# Altium PCB 0.PCB1.PcbDoc (part 2 of 8)
Units mil, origin at the board's own origin, x right, y up, seen from the top; angles counter-clockwise.
Board outline 3897.64 x 3897.64 mil, 6 copper layers (Top Layer, Layer 1, Layer 3, Layer 4, Layer 2, Bottom Layer), stack 60.567 mil thick; 715 components, 563 nets, 2530 pads, 1442 vias.
Unrouted connection lines stored in the file: 6.
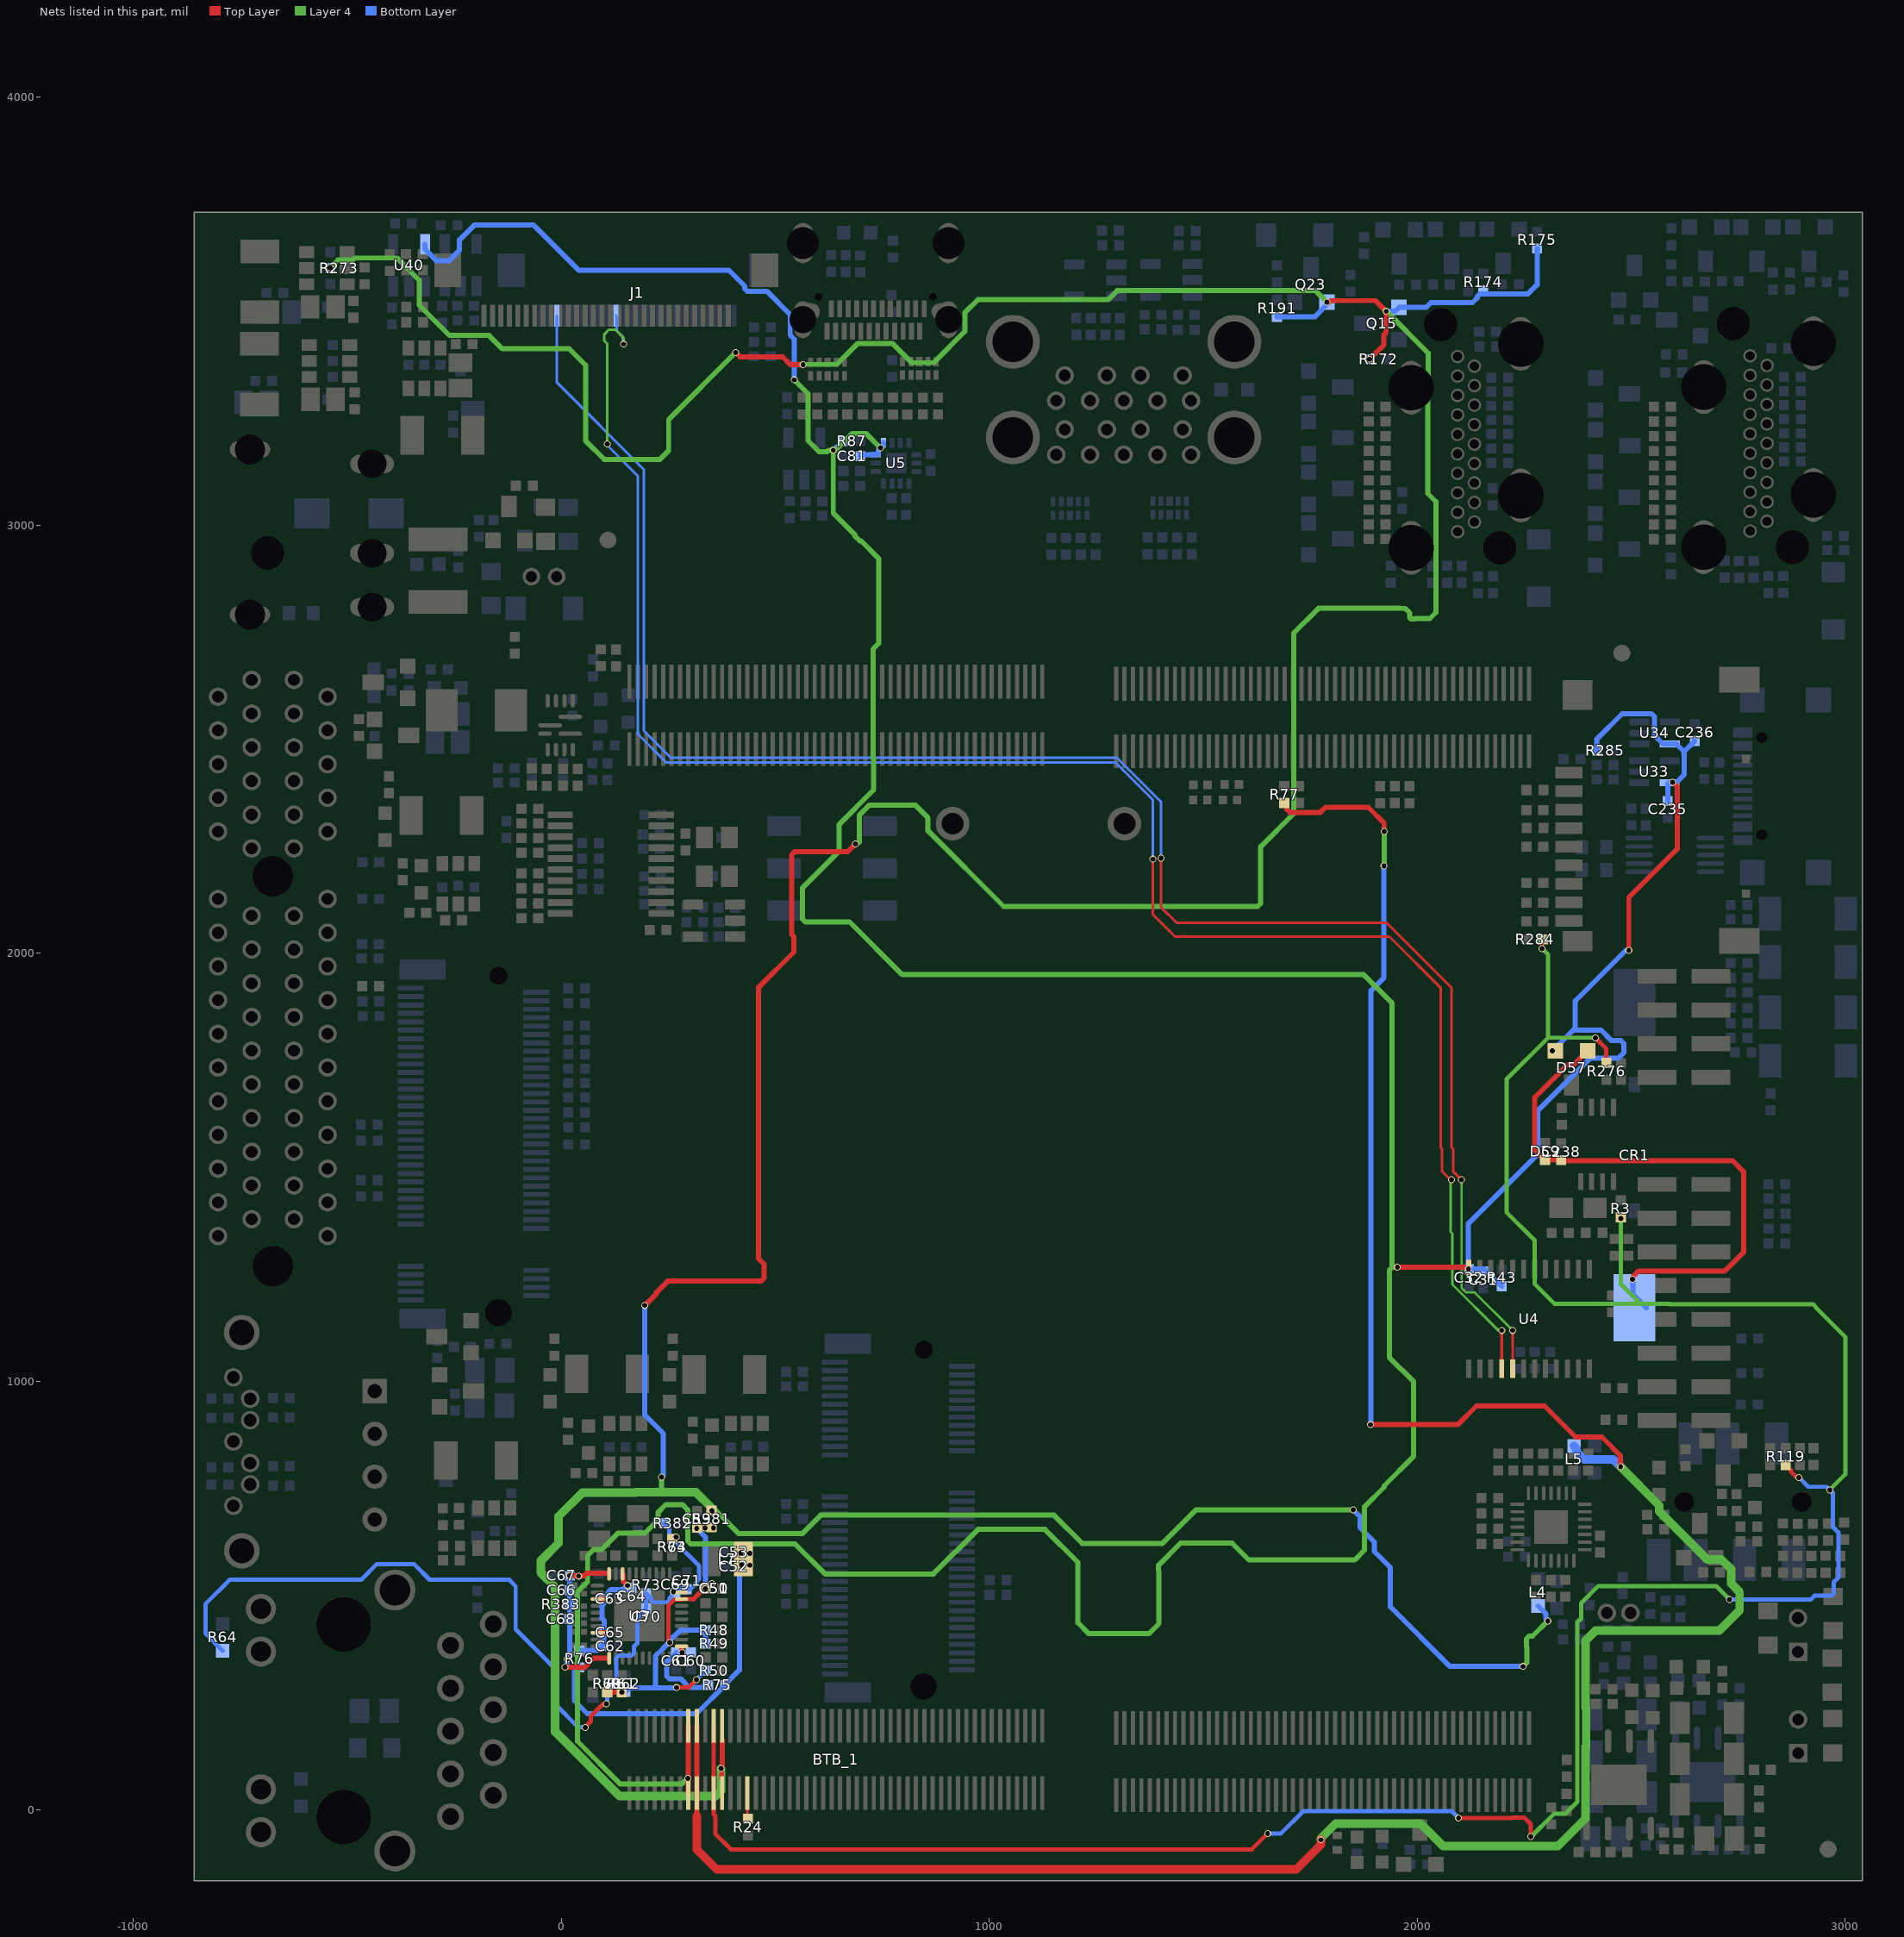
[diagram p6: the nets of this part, all layers, seen from the top]

## Components (designator, comment, footprint, x,y, rotation, side; value= is the part's Value field where it differs from the comment) (continued)
R137 "0R" R0402 -445.1,1923.3 r180 bottom
R138 "100K" R0402 337.09,790.05 r180 top
R139 "10K" R0402 415.06,768.85 r180 top
R140 "1K" R0402 433.9,830.72 r90 bottom
R141 "30K" R0402 337.09,790.05 r180 bottom
R142 "2.2R" R0402 545.29,1021.95 r0 bottom
R143 "2.2R" R0402 545.29,988.15 r0 bottom
R144 "1K" R0402 1020.69,535.95 r0 bottom
R145 "22R" R0402 545.29,549.65 r0 bottom
R146 "1K" R0402 1020.59,501.55 r0 bottom
R147 "4.7K" R0402 545.29,480.75 r0 bottom
R148 "22R" R0402 545.29,515.35 r0 bottom
R149 "20K" R0402 1947.7,2370.7 r270 top
R150 "10K" R0402 1981.9,2370.62 r90 top
R151 "4.7K" R0402 2600.5,3399.21 r0 bottom
R152 "4.7K" R0402 2593.4,3589.79 r270 bottom
R153 "1K" R0402 2830.6,3570.21 r90 bottom
R154 "4.7K" R0402 2995.7,3564.31 r90 bottom
R155 "4.7K" R0402 2936.9,3568.21 r180 bottom
R156 "0R" R0402 2599.02,3357.11 r180 bottom
R157 "47K" R0402 2731.4,3570.01 r0 bottom
R158 "47K" R0402 2652.3,3569.11 r180 bottom
R159 "1.2K" R0402 2592.6,2904.8 r90 bottom
R160 "47K" R0402 2594,3673.91 r270 bottom
R161 "499R" R0402 2572.7,3035.99 r180 bottom
R162 "499R" R0402 2572.7,3070.39 r180 bottom
R163 "499R" R0402 2572.7,3242.39 r180 bottom
R164 "499R" R0402 2572.7,3276.79 r180 bottom
R165 "499R" R0402 2572.7,3173.59 r180 bottom
R166 "499R" R0402 2572.7,3207.99 r180 bottom
R167 "499R" R0402 2572.7,3104.79 r180 bottom
R168 "499R" R0402 2572.7,3139.19 r180 bottom
R169 "1K" R0402 2572.6,2967.51 r180 bottom
R170 "27K" R0402 2490.3,3480.31 r180 bottom
R171 "10K" R0402 2573.1,3002.21 r0 bottom
R172 "4.7K" R0402 1909.1,3387.74 r0 bottom
R173 "10K" R0402 1843.7,3565.46 r270 bottom
R174 "1K" R0402 2154.3,3567.94 r90 bottom
R175 "4.7K" R0402 2280,3666.34 r90 bottom
R176 "10K" R0402 2218.22,3562.74 r180 bottom
R177 "0R" R0402 1938.21,2885.54 r270 bottom
R178 "47K" R0402 2056.3,3562.44 r180 bottom
R179 "47K" R0402 1977.62,3561.94 r180 bottom
R180 "1.2K" R0402 1965,3057.8 r270 bottom
R181 "47K" R0402 1875.6,3653.64 r270 bottom
R182 "499R" R0402 1906.5,3035.94 r180 bottom
R183 "499R" R0402 1906.5,3070.42 r180 bottom
R184 "499R" R0402 1906.5,3242.77 r180 bottom
R185 "499R" R0402 1906.5,3277.24 r180 bottom
R186 "499R" R0402 1906.5,3173.83 r180 bottom
R187 "499R" R0402 1906.5,3208.3 r180 bottom
R188 "499R" R0402 1906.5,3104.89 r180 bottom
R189 "499R" R0402 1906.5,3139.36 r180 bottom
R190 "1K" R0402 1905.81,3002.04 r180 bottom
R191 "27K" R0402 1672.5,3506.34 r90 bottom
R192 "10K" R0402 1906.01,2967.84 r0 bottom
R193 "100R" R0402 2840.2,1460.8 r180 bottom
R194 "100R" R0402 2493.4,1313 r270 top
R195 "100R" R0402 2776.1,946.2 r180 bottom
R196 "100R" R0402 2459.9,910.3 r180 top
R197 "100R" R0402 2777,1019.8 r180 bottom
R198 "100R" R0402 2460.2,984.4 r180 top
R199 "100R" R0402 2776.9,1100.2 r180 bottom
R210 "0R" R0805 2970.7,172.3 r270 top
R211 "0R" R0805 2969.9,313.7 r270 top
R212 "0R" R0805 2971.6,457.73 r270 top
R213 "0R" R0805 2819.5,423.8 r270 top
R216 "33R" R0402 -73.2,2081.63 r180 top
R217 "33R" R0402 -73.2,2116.63 r180 top
R218 "100K" R0402 112.8,826.84 r90 bottom
R219 "49.9R" R0402 -73.2,2116.63 r0 bottom
R220 "49.9R" R0402 -73.2,2081.63 r0 bottom
R221 "1K" R0402 150.2,826.84 r90 bottom
R222 "10K" R0402 130.12,767.4 r180 top
R223 "10K" R0402 210.1,2277.53 r0 bottom
R224 "4.7K" R0402 210.58,2243.73 r0 bottom
R225 "10K" R0402 213.5,2146.33 r0 bottom
R226 "10K" R0402 213.98,2114.43 r0 bottom
R227 "30K" R0402 53.42,785.8 r180 bottom
R228 "33R" R0402 -73.2,2151.63 r180 top
R229 "33R" R0402 -73.2,2186.63 r180 top
R230 "22R" R0402 290.18,2260.25 r270 top
R231 "49.9R" R0402 -73.2,2186.63 r0 bottom
R232 "49.9R" R0402 -73.2,2151.63 r0 bottom
R233 "10K" R0402 213.18,2179.63 r180 bottom
R234 "470R" R0402 214.35,2323.56 r180 bottom
R235 "2.2R" R0402 68.38,2221.5 r180 bottom
R236 "10K" R0402 36.1,1831.2 r0 bottom
R237 "10K" R0402 36.22,1553.1 r0 bottom
R238 "33R" R0402 -73,2234.63 r180 top
R239 "33R" R0402 -73,2268.97 r180 top
R240 "49.9R" R0402 -73,2268.97 r0 bottom
R241 "49.9R" R0402 -73,2234.63 r0 bottom
R242 "33R" R0402 -73,2303.3 r180 top
R243 "33R" R0402 -73,2337.63 r180 top
R244 "49.9R" R0402 -127.7,2289.3 r270 bottom
R245 "49.9R" R0402 -73,2303.3 r0 bottom
R246 "1K" R0402 386.98,2106.43 r180 bottom
R247 "0R" R0402 -444.6,2212.5 r180 bottom
R248 "0R" R0402 -445.3,2127.1 r180 bottom
R249 "100K" R0402 -334.88,2094.8 r180 top
R250 "30K" R0402 -277.78,2134.54 r90 bottom
R251 "1K" R0402 -251.26,2077.4 r180 top
R252 "10K" R0402 -240.38,2138.48 r90 bottom
R255 "10K" R0402 -356.05,2633.67 r270 bottom
R256 "1K" R0402 -472.35,2527.57 r90 top
R257 "10K" R0402 -436.15,2527.17 r270 bottom
R271 "20K" R0402 -513.93,3346.4 r180 bottom
R272 "100K" R0402 -485.21,3504.71 r270 top
R273 "1K" R0402 -519.55,3600.68 r180 bottom
R274 "30K" R0402 -519.55,3563.27 r180 bottom
R275 "22R" R0402 2361.7,2453.8 r180 bottom
R276 "10K" R0402 2442,1724.58 r270 top
R277 "22R" R0402 2476.5,1724.08 r90 top
R278 "22R" R0402 2275.16,2381.32 r0 top
R279 "22R" R0402 2275.08,2334.42 r0 top
R280 "0R" R0402 2275.08,2248.92 r0 top
R281 "22R" R0402 2275.08,2164.32 r0 top
R282 "22R" R0402 2275.08,2118.32 r0 top
R283 "100R" R0402 2275.08,2075.02 r0 top
R284 "NC" R0402 2274.58,2032.7 r180 top
R285 "0R" R0402 2439.31,2473.22 r0 bottom
R290 "100R" R0402 2534.26,2318.6 r90 bottom
R291 "100R" R0402 2500.66,2319.2 r90 bottom
R301 "NC" R0402 -342.9,3633.2 r0 top
R303 "NC" R0402 -342.4,3595.6 r0 top
R306 "1K" R0402 -400.5,3613.9 r90 top
R308 "3.4K" R0402 -278.1,3492.62 r270 bottom
R309 "3.4K" R0402 -395.5,3489.12 r270 bottom
R316 "115K" R0402 -255.82,615.47 r180 bottom
R317 "10K" R0402 -117.92,631.09 r90 bottom
R318 "1K" R0402 -154.92,630.97 r90 bottom
R319 "10K" R0402 -289.62,1074.5 r90 bottom
R320 "1K" R0402 -147.8,1088.1 r180 bottom
R321 "10K" R0402 -231.1,1080.6 r180 bottom
R322 "20K" R0402 -256.4,582.07 r180 top
R323 "3.4K" R0402 1460.2,3491.23 r180 bottom
R324 "NC" R0402 1383,3457.96 r180 bottom
R325 "470R" R0402 2557.41,654.82 r180 top
R326 "300K" R0402 2774.71,626.52 r180 top
R327 "0R" R0402 2796.11,554.82 r0 top
R328 "10K" R0402 -445.1,1923.3 r180 top
R334 "1K" R0402 2002.22,-93.8 r180 bottom
R335 "10K" R0402 2003.42,-128.2 r0 bottom
R341 "0R" R0603 2637.01,333.55 r180 top
R342 "NC" R0603 2637.41,283.95 r180 top
R343 "20K" R0402 2576.71,-73.45 r90 top
R344 "20K" R0402 2471.41,-99.65 r0 top
R345 "1K" R0402 2348.81,16.83 r270 top
R346 "10K" R0402 2313.4,-14.7 r90 top
R347 "0R" R0603 2513.21,294.45 r0 bottom
R348 "NC" R0603 2513.51,343.65 r0 bottom
R349 "20K" R0402 2569.01,-64.33 r90 bottom
R350 "20K" R0402 2672.59,-94.65 r180 bottom
R351 "1K" R0402 2799.9,-72 r270 top
R352 "10K" R0402 2798.6,24.7 r90 top
R354 "27K" R0402 1672.1,3587.64 r90 bottom
R373 "0R" R0201 42.53,523.9 r180 top
R374 "0R" R0201 42.53,504.2 r180 top
R375 "0R" R0201 42.53,474.9 r180 top
R376 "0R" R0201 42.53,455.1 r180 top
R377 "0R" R0201 42.53,434.9 r180 top
R378 "0R" R0201 42.53,415 r180 top
R379 "0R" R0201 42.53,383.1 r180 top
R380 "0R" R0201 42.53,363.1 r180 top
R381 "0R" R0402 351.2,678.7 r90 top
R382 "0R" R0402 260.32,668.7 r0 bottom
R383 "0R" R0402 -0.1,478.6 r180 bottom
R386 "1M" R0402 146.36,593.08 r0 top
R387 "22R" R0402 74.9,592.71 r0 top
SPK1 "FS1508MB0810-H8.0" BEEP-TH_BD15.0-P10.20-D1.2 1115.31,2302.9 r180 bottom
SW1 "GT-TC029B-H020-L1N" SW-SMD_L3.9-W2.9-P4.15-LS5.0 2912.81,1748.9 r180 bottom
SW2 "GT-TC029B-H020-L1N" SW-SMD_L3.9-W2.9-P4.15-LS5.0 2912.81,1862.3 r180 bottom
SW3 "GT-TC029B-H020-L1N" SW-SMD_L3.9-W2.9-P4.15-LS5.0 2912.81,1979.5 r180 bottom
SW4 "GT-TC029B-H020-L1N" SW-SMD_L3.9-W2.9-P4.15-LS5.0 2912.81,2092.1 r180 bottom
SW5 "MST22D18G2" SW-SMD_MST22D18G2 632.3,2198.6 r270 bottom
U1 "ASP9135ZC-R" SOT23_6 -319.6,3367.02 r0 top
U2 "MP8759GD-Z" QFN12-2R00X3R00 -2.12,2532.79 r180 top
U3 "RTL8211F" qfp_40p_r 182.89,452.11 r0 top
U4 "XL9535" TSSOP24-0R65-7R80X4R40 2261.4,1145.8 r90 top
U5 "FUSB302BMPX" WQFN14-0R50-2R5X2R5EP1R45X1R45 782.66,3145 r0 bottom
U6 "LPW5209AB5F" SOT23-5 568,3155.6 r180 bottom
U7 "LPW5209AB5F" SOT23-5 1248,3572.03 r270 bottom
U8 "RCLAMP0524P" USON_10 836.87,3366.65 r0 top
U9 "RCLAMP0524P" USON_10 622.53,3364.75 r0 top
U10 "RCLAMP0524P" USON_10 1188.59,3039.08 r0 bottom
U11 "RCLAMP0524P" USON_10 1421.51,3040.38 r0 bottom
U16 "ES8388" qfn28_0r45-4x4EP2R6X2R6 2312.97,659.92 r90 top
U17 "ASP9135ZC-R" SOT23_6 433.9,854.34 r180 top
U18 "CH340E" MSOP-10_L3.0-W3.0-P0.50-LS5.0-BL -10891.9,20223.34 r270 bottom
U23 "D2315-3R3" DFN1006-2L-BI 1813.4,-77.5 r90 top
U25 "ASP9135ZC-R" SOT23_6 150.2,854.4 r180 top
U26 "RS2CG5705BLE" TSSOP20 115.92,2208.41 r90 top
U27 "TP5108E23E-33" SOT23-5 357.28,2076.43 r90 top
U28 "ASP9135ZC-R" SOT23_6 -240.38,2162.1 r180 top
U31 "ASP9135ZC-R" SOT23_6 -541.49,3383.8 r270 top
U32 "ASP9135ZC-R" SOT23_6 -547.11,3600.68 r270 top
U33 "74LVC1G125GW" SOT-353 2554.03,2424.54 r90 bottom
U34 "74LVC1G125GW" SOT-353 2554.53,2515.04 r90 bottom
U35 "BM8563EMA" msop-8 2420.3,1553.7 r0 top
U39 "LPW5209AB5F" SOT23-5 -234.73,3607.89 r180 bottom
U40 "LPW5209AB5F" SOT23-5 -355.4,3607.2 r180 bottom
U42 "NS4110B" SOP-8-EP-2R5X3R4 2470.91,57.45 r0 top
U43 "ASP9135ZC-R" SOT23_6 -156.42,657.57 r180 top
U46 "NS4110B" SOP-8-EP-2R5X3R4 2678.41,64.15 r180 bottom
U48 "LPW5209AB5F" SOT23-5 1425.8,3572.93 r270 bottom
USBC1 "ZX-TYPEC-WTM1628" USB-C-SMD_ZX-TYPEC-WTM1628 2893.76,2390.32 r270 bottom
Y2 "25MHz" 3225 133.98,661.71 r0 top
Y4 "25MHz" 3225 363.98,2225.33 r90 top
Y5 "32.768KHz" 3215 2375.9,1405.1 r0 top

## Footprints (in the part's own frame and the unit in brackets; to place one, negate y for a bottom-side part, rotate by r counter-clockwise, add the part's x,y. Pads: shape width x height; smd on the part's side, far side on the other; paste and mask are expansions set on the pad)
3215 [mil]
  rect 55.12x47.24 smd: 1(-39.4,0) 2(39.4,0)
  silkscreen extent -75,-35 75,35, body extent -67,-24 67,24, height 150
3225 [mm]
  rect 1.3x1 smd: 1(-1.15,-0.75) 2(1.15,-0.75) 3(1.15,0.75) 4(-1.15,0.75)
  silkscreen extent -2.41,-1.52 0.3,1.2, body extent -1.9,-1.4 1.9,1.4, height 3.81
audio_smd_7p_6r0x8r8 [mm]
  rect 2.5x1.4 smd: 1(3.45,-3.125) 2(3.45,-0.225) 3(3.45,2.675) 4(-3.45,2.975) 6(-3.45,-2.125) 7(-3.45,0.775) 8(3.45,4.875)
  round 1.2 hole 1.2 unplated: ""(0,-3.625) ""(0,3.375)
  silkscreen extent -3,-7.13 4.25,7.38, body extent -5,-7.63 5,7.63, height 3.81
BEEP-TH_BD15.0-P10.20-D1.2 [mm]
  round 2 hole 1.3 paste+0 mask+0.051: 1(-5.1,0) 2(5.1,0)
  silkscreen extent -7.5,-7.5 7.5,7.5
C0402 [mil]
  rect 23.6x23.6 smd: 1(-19.68,0) 2(19.68,0)
  silkscreen extent -37,-17 37,17, body extent -37,-17 37,17, height 150
C0603 [mil]
  rect 31.5x31.5 smd: 1(-31.5,0) 2(31.5,0)
  silkscreen extent -55,-25 55,25, body extent -48,-16 48,16, height 150
C0603_L [mm]
  rect 0.75x0.85 smd: 1(-0.725,0) 2(0.725,0)
  silkscreen extent -1.35,-0.69 1.35,0.69, body extent -0.8,-0.4 0.8,0.4, height 0.8
C0805#1 [mm]
  rect 1.1x1.4 smd: 1(-0.75,0) 2(0.75,0)
  body extent -1.1,-0.72 1.1,0.72, height 1.4
C0805#2 [mm]
  rect 1.16x1.47 smd: 1(-0.89,0) 2(0.89,0)
  silkscreen extent -1.77,-1.04 1.77,1.04, body extent -1.47,-0.74 1.47,0.74, height 3.81
C1206 [mil]
  rect 47.24x74.8 smd: 1(-62.99,0) 2(62.99,0)
  silkscreen extent -94,-47 94,47
CR1220_A [mm]
  rect 0.9x0.7 smd: 0(-3.6,0) 0(3.9,0)
  rect 4x2.5 smd: 1(9.652,0) 2(-8.458,0)
  silkscreen extent -7.5,-7.5 10.16,7.5, body extent -9.42,-7.45 10.34,7.45, height 4.05
dc_in_th_3p_10r1x11r6 [mil]
  oval 94.5x39.4 / inner round 60 / far side oval 94.5x39.4 hole 70.9 slot 15.7 at 90 deg: 1(-111.25,-194.9) 5(-111.25,190.9)
  oval 102.4x43.3 hole 66.9 slot 19.7 at 90 deg: 2(174.25,-51.2) 3(174.25,157.4)
  oval 102.4x43.3 / inner round 60 / far side oval 102.4x43.3 hole 66.9 slot 19.7 at 90 deg: 4(174.25,-177.2)
  round 78.7 hole 78.7 unplated: ""(-69.85,-51.2)
  silkscreen extent -232,-201 226,197, body extent -237,-228 237,228, height 150
DFN1006-2L-BI [mm]
  rect 0.45x0.55 smd paste+0 mask+0.051: 1(-0.425,0) 2(0.425,0)
  silkscreen extent -0.8,-0.4 0.8,0.4
esd0402 [mil]
  rect 23.6x23.6 smd: 1(-19.68,0) 2(19.68,0)
  silkscreen extent -37,-17 37,17, body extent -37,-17 37,17, height 150
F1812 [mil]
  rect 55.38x137.76 smd: 1(-72.97,0) 2(72.97,0)
  silkscreen extent -110,-79 110,79, body extent -89,-63 89,63, height 41
F_100PIN [mm]
  rect 2x0.25 smd: 1(-2,-12.25) 2(-2,-11.75) 3(-2,-11.25) 4(-2,-10.75) 5(-2,-10.25) 6(-2,-9.75) 7(-2,-9.25) 8(-2,-8.75) 9(-2,-8.25) 10(-2,-7.75) 11(-2,-7.25) 12(-2,-6.75) 13(-2,-6.25) 14(-2,-5.75) 15(-2,-5.25) 16(-2,-4.75) 17(-2,-4.25) 18(-2,-3.75) 19(-2,-3.25) 20(-2,-2.75) 21(-2,-2.25) 22(-2,-1.75) 23(-2,-1.25) 24(-2,-0.75) 25(-2,-0.25) 26(-2,0.25) 27(-2,0.75) 28(-2,1.25) 29(-2,1.75) 30(-2,2.25) 31(-2,2.75) 32(-2,3.25) 33(-2,3.75) 34(-2,4.25) 35(-2,4.75) 36(-2,5.25) 37(-2,5.75) 38(-2,6.25) 39(-2,6.75) 40(-2,7.25) 41(-2,7.75) 42(-2,8.25) 43(-2,8.75) 44(-2,9.25) 45(-2,9.75) 46(-2,10.25) 47(-2,10.75) 48(-2,11.25) 49(-2,11.75) 50(-2,12.25) 51(2,12.25) 52(2,11.75) 53(2,11.25) 54(2,10.75) 55(2,10.25) 56(2,9.75) 57(2,9.25) 58(2,8.75) 59(2,8.25) 60(2,7.75) 61(2,7.25) 62(2,6.75) 63(2,6.25) 64(2,5.75) 65(2,5.25) 66(2,4.75) 67(2,4.25) 68(2,3.75) 69(2,3.25) 70(2,2.75) 71(2,2.25) 72(2,1.75) 73(2,1.25) 74(2,0.75) 75(2,0.25) 76(2,-0.25) 77(2,-0.75) 78(2,-1.25) 79(2,-1.75) 80(2,-2.25) 81(2,-2.75) 82(2,-3.25) 83(2,-3.75) 84(2,-4.25) 85(2,-4.75) 86(2,-5.25) 87(2,-5.75) 88(2,-6.25) 89(2,-6.75) 90(2,-7.25) 91(2,-7.75) 92(2,-8.25) 93(2,-8.75) 94(2,-9.25) 95(2,-9.75) 96(2,-10.25) 97(2,-10.75) 98(2,-11.25) 99(2,-11.75) 100(2,-12.25)
  silkscreen extent -2.54,-14.48 2,13.85
FPC-30P-0P5 [mm]
  rect 0.3x1.3 smd: 1(-7.25,2.733) 2(-6.75,2.733) 3(-6.25,2.733) 4(-5.75,2.733) 5(-5.25,2.733) 6(-4.75,2.733) 7(-4.25,2.733) 8(-3.75,2.733) 9(-3.25,2.733) 10(-2.75,2.733) 11(-2.25,2.733) 12(-1.75,2.733) 13(-1.25,2.733) 14(-0.75,2.733) 15(-0.25,2.733) 16(0.25,2.733) 17(0.75,2.733) 18(1.25,2.733) 19(1.75,2.733) 20(2.25,2.733) 21(2.75,2.733) 22(3.25,2.733) 23(3.75,2.733) 24(4.25,2.733) 25(4.75,2.733) 26(5.25,2.733) 27(5.75,2.733) 28(6.25,2.733) 29(6.75,2.733) 30(7.25,2.733)
  rect 1.6x2 smd: 31(9.4,0.032) 32(-9.4,0.032)
  silkscreen extent -10.05,-3.27 10.05,4.14, body extent -10.05,-3.35 10.05,3.35, height 3.81
fpc_24p_0p5 [mm]
  rect 0.3x1.3 smd: 1(-5.75,-2.701) 2(-5.25,-2.701) 3(-4.75,-2.701) 4(-4.25,-2.701) 5(-3.75,-2.701) 6(-3.25,-2.701) 7(-2.75,-2.701) 8(-2.25,-2.701) 9(-1.75,-2.701) 10(-1.25,-2.701) 11(-0.75,-2.701) 12(-0.25,-2.701) 13(0.25,-2.701) 14(0.75,-2.701) 15(1.25,-2.701) 16(1.75,-2.701) 17(2.25,-2.701) 18(2.75,-2.701) 19(3.25,-2.701) 20(3.75,-2.701) 21(4.25,-2.701) 22(4.75,-2.701) 23(5.25,-2.701) 24(5.75,-2.701)
  rect 1.6x2 smd: 25(7.45,0.001) 26(-7.45,0.001)
  silkscreen extent -8.1,-3.95 8.1,3.35, body extent -8.1,-3.35 8.1,3.35, height 3.81
HDMI-SMD [mm]
  round 0.8 hole 0.55: 1(1.276,0.5) 2(0.707,-0.5) 3(0.121,0.5) 4(-0.449,-0.5) 5(-1.034,0.5) 6(-1.605,-0.5) 7(-2.189,0.5) 8(-2.761,-0.5) 9(-3.344,0.5) 10(-3.917,-0.5) 11(-4.499,0.5) 12(-5.073,-0.5) 13(-5.654,0.5) 14(-6.229,-0.5) 15(-6.809,0.5) 16(-7.385,-0.5) 17(-7.964,0.5) 18(-8.541,-0.5) 19(-9.119,0.5)
  oval 3.2x1.4 / inner round 1.524 / far side oval 3.2x1.4 hole 2.7 slot 0.9 at 90 deg: G1(-10.074,3.25) G2(-0.574,3.25) G3(-6.974,-3.25) G4(2.026,-3.25)
  round 1.999 hole 1.999 unplated: ""(-10.074,-2) ""(3.176,1.5)
  silkscreen extent -11.43,-5.02 19.77,5, body extent -11.78,-4.05 11.78,4.05, height 3.81
HDR-SMD_HX-PZ2.0-2X4P-WT [mm]
  rect 0.89x2.3 smd paste+0 mask+0.05: 1(-3,-1.6) 2(-3,1.6) 3(-1,-1.6) 4(-1,1.6) 5(1,-1.6) 6(1,1.6) 7(3,-1.6) 8(3,1.6)
  silkscreen extent -4.16,-10.15 4,-1.81
HY911130A [mm]
  round 1.6 / inner round 1.524 / far side round 1.6 hole 1: 1(5.629,-8.79) 2(4.359,-6.25) 3(3.089,-8.79) 4(1.819,-6.25) 5(0.549,-8.79) 6(-0.721,-6.25) 7(-1.991,-8.79) 8(-3.261,-6.25) 9(-4.531,-8.79)
  round 1.6 hole 1: 10(-5.801,-6.25)
  round 1.8 / inner round 1.524 / far side round 1.8 hole 1.2: 11(6.534,5) 12(3.994,5) 13(-4.177,5) 14(-6.717,5)
  round 2.43 / inner round 1.524 / far side round 2.43 hole 1.83: 15(7.654,-2.95) 16(-7.836,-2.95)
  round 3.25 hole 3.25 unplated: ""(-5.806,0.1) ""(5.624,0.1)
  silkscreen extent -8.11,-10.3 7.93,17.1, body extent -9.11,-11.1 9.11,11.1, height 3.81
L0518 [mm]
  rect 1.9x2.5 smd: 1(-2.05,0) 2(2.05,0)
  silkscreen extent -2.75,-2.65 2.75,2.65, body extent -3.1,-2.8 3.1,2.8, height 3.81
L0603#1 [mm]
  rect 0.75x0.85 smd: 1(-0.725,0) 2(0.725,0)
  silkscreen extent -1.35,-0.69 1.35,0.69, body extent -0.8,-0.4 0.8,0.4, height 0.8
L0603#2 [mm]
  rect 0.8x0.8 smd: 1(-0.8,0) 2(0.8,0)
  silkscreen extent -1.38,-0.61 1.4,0.61, body extent -1.2,-0.4 1.2,0.4, height 3.81
L2520 [mil]
  rect 44x80 smd: 1(-37.75,0) 2(37.75,0)
  silkscreen extent -68,-48 68,48, body extent -65,-45 65,45, height 150
l4520 [mil]
  rect 55.12x90.55 smd: 1(-70.97,-0.1) 2(70.77,-0.1)
  silkscreen extent -91,-87 90,87, body extent -91,-87 91,87, height 150
LED0603_R [mil]
  rect 30x30 smd: 1(-30,0) 2(30,0)
  silkscreen extent -53,-23 61,23, body extent -31,-16 32,16, height 18
M2_NGFF_E_KEY [mm]
  rect 0.3x1.55 smd: 1(9.25,-3.3) 2(9,4.25) 3(8.75,-3.3) 4(8.5,4.25) 5(8.25,-3.3) 6(8,4.25) 7(7.75,-3.3) 8(7.5,4.25) 9(7.25,-3.3) 10(7,4.25) 11(6.75,-3.3) 12(6.5,4.25) 13(6.25,-3.3) 14(6,4.25) 15(5.75,-3.3) 16(5.5,4.25) 17(5.25,-3.3) 18(5,4.25) 19(4.75,-3.3) 20(4.5,4.25) 21(4.25,-3.3) 22(4,4.25) 23(3.75,-3.3) 32(1.5,4.25) 33(1.25,-3.3) 34(1,4.25) 35(0.75,-3.3) 36(0.5,4.25) 37(0.25,-3.3) 38(0,4.25) 39(-0.25,-3.3) 40(-0.5,4.25) 41(-0.75,-3.3) 42(-1,4.25) 43(-1.25,-3.3) 44(-1.5,4.25) 45(-1.75,-3.3) 46(-2,4.25) 47(-2.25,-3.3) 48(-2.5,4.25) 49(-2.75,-3.3) 50(-3,4.25) 51(-3.25,-3.3) 52(-3.5,4.25) 53(-3.75,-3.3) 54(-4,4.25) 55(-4.25,-3.3) 56(-4.5,4.25) 57(-4.75,-3.3) 58(-5,4.25) 59(-5.25,-3.3) 60(-5.5,4.25) 61(-5.75,-3.3) 62(-6,4.25) 63(-6.25,-3.3) 64(-6.5,4.25) 65(-6.75,-3.3) 66(-7,4.25) 67(-7.25,-3.3) 68(-7.5,4.25) 69(-7.75,-3.3) 70(-8,4.25) 71(-8.25,-3.3) 72(-8.5,4.25) 73(-8.75,-3.3) 74(-9,4.25) 75(-9.25,-3.3)
  rect 1.2x2.75 smd: 76(10.35,-2.525) 77(-10.35,-2.525)
  round 1.6 hole 1.6 unplated: ""(-10,1.975)
  round 1.1 hole 1.1 unplated: ""(10,1.975)
  silkscreen extent -11,-1.13 11,4.12, body extent -11,-4.13 11,4.12, height 3.81
M2_NGFF_M_KEY [mm]
  rect 0.3x1.55 smd: 1(-9.25,3.762) 2(-9,-3.687) 3(-8.75,3.762) 4(-8.5,-3.687) 5(-8.25,3.762) 6(-8,-3.687) 7(-7.75,3.762) 8(-7.5,-3.687) 9(-7.25,3.762) 10(-7,-3.687) 11(-6.75,3.762) 12(-6.5,-3.687) 13(-6.25,3.762) 14(-6,-3.687) 15(-5.75,3.762) 16(-5.5,-3.687) 17(-5.25,3.762) 18(-5,-3.687) 19(-4.75,3.762) 20(-4.5,-3.687) 21(-4.25,3.762) 22(-4,-3.687) 23(-3.75,3.762) 24(-3.5,-3.687) 25(-3.25,3.762) 26(-3,-3.687) 27(-2.75,3.762) 28(-2.5,-3.687) 29(-2.25,3.762) 30(-2,-3.687) 31(-1.75,3.762) 32(-1.5,-3.687) 33(-1.25,3.762) 34(-1,-3.687) 35(-0.75,3.762) 36(-0.5,-3.687) 37(-0.25,3.762) 38(0,-3.687) 39(0.25,3.762) 40(0.5,-3.687) 41(0.75,3.762) 42(1,-3.687) 43(1.25,3.762) 44(1.5,-3.687) 45(1.75,3.762) 46(2,-3.687) 47(2.25,3.762) 48(2.5,-3.687) 49(2.75,3.762) 50(3,-3.687) 51(3.25,3.762) 52(3.5,-3.687) 53(3.75,3.762) 54(4,-3.687) 55(4.25,3.762) 56(4.5,-3.687) 57(4.75,3.762) 58(5,-3.687) 67(7.25,3.762) 68(7.5,-3.687) 69(7.75,3.762) 70(8,-3.687) 71(8.25,3.762) 72(8.5,-3.687) 73(8.75,3.762) 74(9,-3.687) 75(9.25,3.762)
  rect 1.2x2.75 smd: 76(10.35,3.062) 77(-10.35,3.062)
  round 1.1 hole 1.1 unplated: ""(-10,-1.438)
  round 1.6 hole 1.6 unplated: ""(10,-1.438)
  silkscreen extent -10.95,-81.8 10.95,1.61, body extent -10.95,-4.56 10.95,4.56, height 3.81
"Mark 1" [mm]
  round 1 smd paste-1 mask+0.7: Mark(0,0)
  Keep-Out Layer circle w0.1: c0,0 r1.5
MIC2-4R00-TM [mm]
  round 1.1 hole 0.7: 1(-0.7,-0.55) 2(0.7,-0.55)
  silkscreen extent -2,-2 2,2, body extent -2.11,-2.11 2.11,2.11, height 3.81
msop-8 [mm]
  rect 0.3x1 smd: 1(-0.975,-2.2) 2(-0.325,-2.2) 3(0.325,-2.2) 4(0.975,-2.2) 5(0.975,2.2) 6(0.325,2.2) 7(-0.325,2.2) 8(-0.975,2.2)
  silkscreen extent -1.5,-3.3 1.5,1.5, body extent -1.5,-2.8 1.5,2.8, height 3.81
MSOP-10_L3.0-W3.0-P0.50-LS5.0-BL [mm]
  oval 0.28x1.62 smd paste+0 mask+0.051: 1(456.035,-344.857) 2(456.535,-344.857) 3(457.035,-344.857) 4(457.535,-344.857) 5(458.035,-344.857) 6(458.035,-340.637) 7(457.535,-340.637) 8(457.035,-340.637) 9(456.535,-340.637) 10(456.035,-340.637)
  silkscreen extent 455.29,-345.01 458.61,-341.68
PCIE_64PIN_1R00 [mm]
  round 1.1 hole 0.7: A1(-16.765,1.25) A2(-15.765,3.25) A3(-14.765,1.25) A4(-13.765,3.25) A5(-12.765,1.25) A6(-11.765,3.25) A7(-10.765,1.25) A8(-9.765,3.25) A9(-8.765,1.25) A10(-7.765,3.25) A11(-6.765,1.25) A12(-3.765,3.25) A13(-2.765,1.25) A14(-1.765,3.25) A15(-0.765,1.25) A16(0.235,3.25) A17(1.235,1.25) A18(2.235,3.25) A19(3.235,1.25) A20(4.235,3.25) A21(5.235,1.25) A22(6.235,3.25) A23(7.235,1.25) A24(8.235,3.25) A25(9.235,1.25) A26(10.235,3.25) A27(11.235,1.25) A28(12.235,3.25) A29(13.235,1.25) A30(14.235,3.25) A31(15.235,1.25) A32(16.235,3.25) B1(-16.765,-1.25) B2(-15.765,-3.25) B3(-14.765,-1.25) B4(-13.765,-3.25) B5(-12.765,-1.25) B6(-11.765,-3.25) B7(-10.765,-1.25) B8(-9.765,-3.25) B9(-8.765,-1.25) B10(-7.765,-3.25) B11(-6.765,-1.25) B12(-3.765,-3.25) B13(-2.765,-1.25) B14(-1.765,-3.25) B15(-0.765,-1.25) B16(0.235,-3.25) B17(1.235,-1.25) B18(2.235,-3.25) B19(3.235,-1.25) B20(4.235,-3.25) B21(5.235,-1.25) B22(6.235,-3.25) B23(7.235,-1.25) B24(8.235,-3.25) B25(9.235,-1.25) B26(10.235,-3.25) B27(11.235,-1.25) B28(12.235,-3.25) B29(13.235,-1.25) B30(14.235,-3.25) B31(15.235,-1.25) B32(16.235,-3.25)
  round 2.4 hole 2.4 unplated: ""(-5.115,0) ""(18.035,0)
  silkscreen extent -19.61,-4.39 19.61,4.39, body extent -19.61,-4.39 19.61,4.39, height 3.81
PH-1x2-2P0_l [mm]
  rect 1.1x1.1 hole 0.7: 1(-1,-0.6)
  round 1.1 hole 0.7: 2(1,-0.6)
  silkscreen extent -3,-2.6 3,2.6, body extent -3.1,-2.7 3.1,2.7, height 3.81
QFN12-2R00X3R00 [mm]
  oval 1.4x0.25 smd: 1(-0.6,0.5) 2(-0.6,-0.5) 7(0.6,0)
  oval 0.25x0.8 smd: 3(-0.75,-1.45) 4(-0.25,-1.45) 5(0.25,-1.45) 6(0.75,-1.45) 9(0.75,1.45) 10(0.25,1.45) 11(-0.25,1.45) 12(-0.75,1.45)
  oval 0.8x0.25 smd: 8(0.9,0.5)
  silkscreen extent -2.25,-2 1.5,2, body extent -1.5,-2 1.5,2, height 3.81
qfn28_0r45-4x4EP2R6X2R6 [mm]
  oval 0.8x0.2 smd: 1(-2,1.35)
  rect 0.8x0.2 smd: 2(-2,0.9) 3(-2,0.45) 4(-2,0) 5(-2,-0.45) 6(-2,-0.9) 7(-2,-1.35) 15(2,-1.35) 16(2,-0.9) 17(2,-0.45) 18(2,0) 19(2,0.45) 20(2,0.9) 21(2,1.35)
  rect 0.2x0.8 smd: 8(-1.35,-2) 9(-0.9,-2) 10(-0.45,-2) 11(0,-2) 12(0.45,-2) 13(0.9,-2) 14(1.35,-2) 22(1.35,2) 23(0.9,2) 24(0.45,2) 25(0,2) 26(-0.45,2) 27(-0.9,2) 28(-1.35,2)
  rect 2x2 smd: 29(0,0)
  silkscreen extent -3.15,-2 2,2.03, body extent -2.5,-2.5 2.5,2.5, height 3.81
qfp_40p_r [mil]
  oval 31.5x8.66 smd: 1(-98.43,70.87) 2(-98.43,55.12) 3(-98.43,39.37) 4(-98.43,23.62) 5(-98.43,7.87) 6(-98.43,-7.87) 7(-98.43,-23.62) 8(-98.43,-39.37) 9(-98.43,-55.12) 10(-98.43,-70.87) 21(98.43,-70.87) 22(98.43,-55.12) 23(98.43,-39.37) 24(98.43,-23.62) 25(98.43,-7.87) 26(98.43,7.87) 27(98.43,23.62) 28(98.43,39.37) 29(98.43,55.12) 30(98.43,70.87)
  oval 8.66x31.5 smd: 11(-70.87,-98.43) 12(-55.12,-98.43) 13(-39.37,-98.43) 14(-23.62,-98.43) 15(-7.87,-98.43) 16(7.87,-98.43) 17(23.62,-98.43) 18(39.37,-98.43) 19(55.12,-98.43) 20(70.87,-98.43) 31(70.87,98.43) 32(55.12,98.43) 33(39.37,98.43) 34(23.62,98.43) 35(7.87,98.43) 36(-7.87,98.43) 37(-23.62,98.43) 38(-39.37,98.43) 39(-55.12,98.43) 40(-70.87,98.43)
  rect 118.11x118.11 smd: 41(0,0)
  silkscreen extent -124,-98 98,124, body extent -116,-116 116,116, height 150
R0201 [mm]
  rect 0.35x0.35 smd: 1(-0.275,0) 2(0.275,0)
  silkscreen extent -0.51,-0.25 0.51,0.25, body extent -0.47,-0.18 0.47,0.18, height 3.81
R0402 [mil]
  rect 23.6x23.6 smd: 1(-19.68,0) 2(19.68,0)
  silkscreen extent -37,-17 37,17, body extent -37,-17 37,17, height 150
R0402_L [mm]
  rect 0.5x0.5 smd: 1(-0.425,0) 2(0.425,0)
  silkscreen extent -0.88,-0.46 0.87,0.46, body extent -0.5,-0.25 0.5,0.25, height 0.3
R0603 [mil]
  rect 31.5x31.5 smd: 1(-31.5,0) 2(31.5,0)
  silkscreen extent -55,-24 55,24, body extent -47,-16 47,16, height 150
R0805 [mil]
  rect 40x45 smd: 1(40,0) 2(-40,0)
  silkscreen extent -70,-35 70,35, body extent -60,-25 60,25, height 150
SMA_CA [mm]
  rect 2.1x1.8 smd: 1(-2.2,0) 2(2.2,0)
  silkscreen extent -2.2,-1.3 2.2,1.3, body extent -3.3,-1.4 3.3,1.4, height 3.81
SOD523 [mm]
  rect 0.6x0.7 smd: 1(-0.71,0) 2(0.71,0)
  silkscreen extent -1.3,-0.5 0.6,0.5, body extent -1.1,-0.4 1.1,0.4, height 3.81
SOD-123 [mm]
  rect 1.2x1.4 smd: 1(1.7,0) 2(-1.7,0)
  silkscreen extent -1.8,-0.9 1.8,0.9, body extent -2.4,-1 2.4,1, height 3.81
SOP-8-EP-2R5X3R4 [mm]
  oval 0.4x1.4 smd: 1(-1.905,-2.6) 2(-0.635,-2.6) 3(0.635,-2.6) 4(1.905,-2.6) 5(1.905,2.6) 6(0.635,2.6) 7(-0.635,2.6) 8(-1.905,2.6)
  rect 3.3x2.4 smd: 9(0,0)
  silkscreen extent -2.79,-3.18 2.5,2, body extent -2.5,-3 2.5,3, height 3.81
SOT23 [mil]
  rect 36x36 smd: 1(-37.5,-43.5) 2(37.5,-43.5)
  rect 36x50 smd: 3(0,36.5)
  silkscreen extent -55,-55 55,36, body extent -56,-62 56,62, height 150
SOT23-5 [mm]
  rect 0.599x1.199 smd: 1(-0.95,-1.25) 2(0,-1.25) 3(0.95,-1.25) 4(0.95,1.25) 5(-0.95,1.25)
  silkscreen extent -1.96,-1.85 1.5,0.9, body extent -1.6,-1.9 1.6,1.9, height 3.81
SOT23_6 [mm]
  rect 0.7x0.9 smd: 1(-0.95,-1.2) 2(0,-1.2) 3(0.95,-1.2) 4(0.95,1.2) 5(0,1.2) 6(-0.95,1.2)
  silkscreen extent -2.19,-1.25 1.4,0.6, body extent -1.4,-1.2 1.4,1.2, height 3.81
SOT-353 [mil]
  rect 16x47 smd: 1(-25.91,-35.43) 2(-0.31,-35.43) 3(25.28,-35.43) 4(25.28,35.43) 5(-25.91,35.43)
  silkscreen extent -55,-80 45,70, body extent -40,-65 40,65, height 150
ssata_v [mm]
  round 1.1 hole 0.75: 1(-3.81,0.95) 2(-2.54,-0.05) 3(-1.27,-0.05) 4(0,0.95) 5(1.27,-0.05) 6(2.54,-0.05) 7(3.81,0.95)
  round 2.1 hole 1.5: S1(6.48,0.45) S2(-6.48,0.45)
  silkscreen extent -8,-3.25 8,3.2, body extent -8.1,-3.25 8.1,3.25, height 3.81
SW-SMD_L3.9-W2.9-P4.15-LS5.0 [mm]
  rect 1.35x2 smd paste+0 mask+0.051: 1(-2.25,0) 2(2.25,0)
  silkscreen extent -2,-1.45 2,1.45
SW-SMD_MST22D18G2 [mm]
  rect 1.2x2 smd: 1(-2.5,2.85) 2(0,2.85) 3(2.5,2.85) 4(-2.5,-2.85) 5(0,-2.85) 6(2.5,-2.85)
  silkscreen extent -4.6,-1.78 4.57,1.8
TFCARD [mil]
  rect 27.56x62.99 smd: 1(88.58,206.82) 2(45.27,206.82) 3(1.97,206.82) 4(-41.34,206.82) 5(-84.65,206.82) 6(-127.95,206.82) 7(-171.26,206.82) 8(-214.57,206.82) 9(-257.88,206.82)
  rect 47.24x70 smd: 10(-305.12,187.13)
  rect 60x95 smd: 11(-305.12,-190.82) 12(305.12,-190.82)
  rect 70x70 smd: 13(269.68,187.13)
  rect 19.68x19.68 smd: ""(-194.88,-206.57) ""(120.08,-206.57)
  silkscreen extent -289,-365 281,179, body extent -335,-238 335,238, height 150
TSSOP20 [mm]
  rect 0.4x1.5 smd: 1(-2.925,-3) 2(-2.275,-3) 3(-1.625,-3) 4(-0.975,-3) 5(-0.325,-3) 6(0.325,-3) 7(0.975,-3) 8(1.625,-3) 9(2.275,-3) 10(2.925,-3) 11(2.925,3) 12(2.275,3) 13(1.625,3) 14(0.975,3) 15(0.325,3) 16(-0.325,3) 17(-0.975,3) 18(-1.625,3) 19(-2.275,3) 20(-2.925,3)
  silkscreen extent -3.31,-4.61 3.3,2.1, body extent -3.3,-3.8 3.3,3.8, height 3.81
TSSOP24-0R65-7R80X4R40 [mm]
  rect 1.1x0.3 smd: 1(-2.95,3.575) 2(-2.95,2.925) 3(-2.95,2.275) 4(-2.95,1.625) 5(-2.95,0.975) 6(-2.95,0.325) 7(-2.95,-0.325) 8(-2.95,-0.975) 9(-2.95,-1.625) 10(-2.95,-2.275) 11(-2.95,-2.925) 12(-2.95,-3.575) 13(2.95,-3.575) 14(2.95,-2.925) 15(2.95,-2.275) 16(2.95,-1.625) 17(2.95,-0.975) 18(2.95,-0.325) 19(2.95,0.325) 20(2.95,0.975) 21(2.95,1.625) 22(2.95,2.275) 23(2.95,2.925) 24(2.95,3.575)
  silkscreen extent -4.1,-3.9 2.2,3.9, body extent -3.6,-4.1 3.6,4.1, height 3.81
USB3D0-AF-18P [mm]
  round 1.1 hole 0.7: 1(-3.5,2.899) 2(-1.001,2.899) 3(1.001,2.899) 4(3.5,2.899) 5(4,4.401) 6(1.999,4.401) 7(0,4.401) 8(-1.999,4.401) 9(-4.001,4.401) 10(-3.5,6.1) 11(-1.001,6.1) 12(1.001,6.1) 13(3.5,6.1) 14(4,7.601) 15(1.999,7.601) 16(0,7.601) 17(-1.999,7.601) 18(-4.001,7.601)
  round 3.2 / inner round 1.524 / far side round 3.2 hole 2.4: 19(6.571,0.9) 20(6.571,6.58) 21(-6.571,6.58) 22(-6.571,0.9)
  silkscreen extent -8,-16.73 8,8.77, body extent -8.4,-8.8 8.4,8.8, height 3.81
usb-c-smd_tyc-324g [mm]
  oval 1x2.2 hole 1.6 slot 0.6 at 0 deg: 1(-4.32,2.99) 4(4.32,2.99)
  oval 1.2x2.4 / inner round 1.524 / far side oval 1.2x2.4 hole 1.9 slot 0.6 at 0 deg: 2(-4.32,-1.56) 3(4.32,-1.56)
  rect 0.3x1 smd: A1(-2.62,3.68) A2(-2.13,3.68) A3(-1.63,3.68) A4(-1.13,3.68) A5(-0.62,3.68) A6(-0.12,3.68) A7(0.38,3.68) A8(0.88,3.68) A9(1.37,3.68) A10(1.87,3.68) A11(2.37,3.68) A12(2.88,3.68) B1(2.63,2.34) B2(2.13,2.34) B3(1.63,2.34) B4(1.13,2.34) B5(0.62,2.34) B6(0.12,2.34) B7(-0.38,2.34) B8(-0.87,2.34) B9(-1.37,2.34) B10(-1.87,2.34) B11(-2.37,2.34) B12(-2.88,2.34)
  oval 1.5x1 hole 0.5 slot 1.2 at 0 deg: ""(-4.06,2.51) ""(4.06,2.51)
  round 0.5 hole 0.5 unplated: ""(-3.4,1.63) ""(3.4,1.63)
  silkscreen extent -6,-10.14 6,1.67, body extent -4.97,-4.24 4.97,4.24, height 3.81
USB-C-SMD_ZX-TYPEC-WTM1628 [mm]
  rect 1.5x1.5 smd paste+0 mask+0.051: 13(-5.12,2.817) 14(-5.12,-1.113) 15(5.12,2.817) 16(5.12,-1.113)
  rect 0.6x1.15 smd paste+0 mask+0.051: A1B12(-3.2,3.392) A4B9(-2.4,3.392) B1A12(3.2,3.392) B4A9(2.4,3.392)
  rect 0.3x1.15 smd paste+0 mask+0.051: A5(-1.25,3.392) A6(-0.25,3.392) A7(0.25,3.392) A8(1.25,3.392) B5(1.75,3.392) B6(0.75,3.392) B7(-0.75,3.392) B8(-1.75,3.392)
  round 0.65 hole 0.65 unplated paste+0: ""(-2.89,2.249) ""(2.89,2.249)
  silkscreen extent -4.45,-3.59 4.45,3.77
USON_10 [mm]
  rect 0.3x0.55 smd: 1(-1,-0.4) 2(-0.5,-0.4) 4(0.5,-0.4) 5(1,-0.4) 6(1,0.4) 7(0.5,0.4) 9(-0.5,0.4) 10(-1,0.4)
  rect 0.4x0.55 smd: 3(0,-0.4) 8(0,0.4)
  silkscreen extent -1.95,-0.95 1.3,0.5
WQFN14-0R50-2R5X2R5EP1R45X1R45 [mm]
  rect 0.6x0.3 smd: 1(-1.21,0.5) 2(-1.21,0) 3(-1.21,-0.5) 8(1.21,-0.5) 9(1.21,0) 10(1.21,0.5)
  rect 0.3x0.6 smd: 4(-0.75,-1.21) 5(-0.25,-1.21) 6(0.25,-1.21) 7(0.75,-1.21) 11(0.75,1.21) 12(0.25,1.21) 13(-0.25,1.21) 14(-0.75,1.21)
  rect 1.2x1.2 smd: 15(0,0)
  silkscreen extent -2.25,-1.25 1.25,1.25, body extent -1.6,-1.6 1.6,1.6, height 3.81
XH2p54-4p [mm]
  rect 1.45x1.45 / inner round 1.524 / far side rect 1.45x1.45 hole 0.85: 1(-3.81,0.508)
  round 1.45 hole 0.85: 2(-1.27,0.508) 3(1.27,0.508)
  round 1.45 / inner round 1.524 / far side round 1.45 hole 0.85: 4(3.81,0.508)
  silkscreen extent -6.51,-3.03 6.51,3.05, body extent -6.48,-3.05 6.48,3.05, height 3.81
zh1p5mm_th_2p [mm]
  round 1.05 hole 0.65: 1(-0.75,0.65) 2(0.75,0.65)
  silkscreen extent -2.25,-1.85 2.25,1.85

## Part data
BTB_1 BTB_2 BTB_3 BTB_4: library part Component_1_1
C1 C2 C3 C4 C5 C6 C7 C8 C9 C10 C11 C12 C13 C14 C15 C16 C17 C18 C19 C20 C21 C22 C23 C24 C25 C26 C27 C28 C29 C30 C31 C32 C50 C51 C52 C53 C54 C55 C56 C57 C58 C59 C60 C61 C62 C63 C64 C65 C66 C67 C68 C69 C70 C71 C72 C73 C74 C75 C76 C77 C78 C79 C80 C81 C82 C83 C84 C85 C86 C87 C88 C89 C90 C91 C106 C107 C108 C109 C110 C111 C112 C113 C114 C115 C116 C117 C118 C119 C120 C121 C122 C123 C124 C125 C126 C127 C128 C129 C130 C131 C132 C133 C134 C135 C136 C137 C138 C139 C140 C141 C142 C143 C144 C145 C146 C147 C148 C149 C150 C151 C152 C153 C154 C156 C157 C158 C159 C160 C161 C162 C163 C164 C165 C166 C167 C168 C169 C170 C171 C172 C173 C174 C175 C176 C177 C178 C179 C180 C181 C182 C183 C184 C185 C186 C187 C188 C189 C190 C191 C192 C193 C194 C195 C196 C197 C198 C210 C211 C218 C219 C224 C225 C226 C227 C228 C229 C230 C231 C232 C233 C234 C235 C236 C237 C238 C239 C240 C241 C249 C250 C251 C252 C253 C256 C257 C259 C260 C261 C262 C278 C279 C280 C281 C282 C283 C284 C285 C286 C287 C288 C289 C290 C291 C292 C293 C294 C295 C296 C297 C298 C299 C300 C301 C302 C303 C304 C305 C306 C307 C308 C309 C310 C311 C312: library part CAP_NP
C35 C36: library part C, "贴片电容/MLCC电容"
CR1: library part BAT_CR1220_CR2032, "微型电池"
D1 D2 D3 D4 D5 D6 D8 D9 D10 D11 D12 D13 D14 D16 D17 D18 D19 D20 D21 D22 D23 D24 D25 D27 D28 D29 D30 D31 D32 D34 D35 D36 D37 D38 D39 D50 D51 D52 D53 D54 D59 D65 D66 D67 D68 D69 D70 D71 D72 D73 D78 D79 D80 D81 D82 D83 D85 D86 D87 D88: library part "DIODE BI-DIR TRIG"
D7 D26 D33 D49: library part DIODE_SCHTKY
D15: library part DIODE
F1: library part FUSE
J1: library part FPC-24P
J8: library part TYPE-C-24P
J12 J42 J43: library part 1X2PIN
J14: library part FPC-30P
J20: library part PCIEX4_64P
J38: library part 1X4PIN
L1 L4 L5 L11 L12 L14 L15 L19 L27 L28 L29: library part BEAD
L2 L3 L7 L16 L17 L20 L21 L25 L26: library part IND
LED1 LED2: library part LED, "贴片LED"
MR1 MR2 MR3 MR4 MR5 MR6: library part MARK, "光学定位点"
Q1 Q5 Q30: library part MOSFET_P
Q2 Q31 Q32 Q35: library part NPN
Q3 Q4: library part "MOSFET N"
R1 R2 R3 R4 R5 R6 R7 R8 R9 R10 R11 R12 R13 R14 R15 R16 R17 R18 R19 R24 R25 R26 R27 R28 R29 R30 R31 R32 R33 R34 R35 R36 R37 R38 R39 R40 R43 R48 R49 R50 R51 R52 R53 R54 R55 R56 R57 R58 R59 R60 R61 R62 R63 R64 R65 R66 R67 R68 R69 R70 R71 R72 R73 R74 R75 R76 R77 R78 R79 R80 R81 R82 R83 R84 R85 R86 R87 R88 R89 R90 R91 R92 R93 R94 R95 R96 R97 R98 R99 R110 R111 R112 R113 R114 R115 R116 R117 R118 R119 R120 R121 R122 R123 R124 R125 R126 R127 R128 R129 R130 R131 R132 R133 R134 R135 R136 R137 R138 R139 R140 R141 R142 R143 R144 R145 R146 R147 R148 R149 R150 R151 R152 R153 R154 R155 R156 R157 R158 R159 R160 R161 R162 R163 R164 R165 R166 R167 R168 R169 R170 R171 R172 R173 R174 R175 R176 R177 R178 R179 R180 R181 R182 R183 R184 R185 R186 R187 R188 R189 R190 R191 R192 R193 R194 R195 R196 R197 R198 R199 R210 R211 R212 R213 R216 R217 R218 R219 R220 R221 R222 R223 R224 R225 R226 R227 R228 R229 R230 R231 R232 R233 R234 R235 R236 R237 R238 R239 R240 R241 R242 R243 R244 R245 R246 R247 R248 R249 R250 R251 R252 R255 R256 R257 R271 R272 R273 R274 R275 R276 R277 R278 R279 R280 R281 R282 R283 R284 R285 R290 R291 R301 R303 R306 R308 R309 R316 R317 R318 R319 R320 R321 R322 R323 R324 R325 R326 R327 R328 R334 R335 R341 R342 R343 R344 R345 R346 R347 R348 R349 R350 R351 R352 R354 R373 R374 R375 R376 R377 R378 R379 R380 R381 R382 R383 R386 R387: library part RES
R20 R21 R22 R23: library part R, "贴片电阻"
U1 U17 U25 U28 U31 U32 U43: library part TP6327GS6
U26: library part PI6C557-05BLE
U27: library part LDO_PT5108
U33 U34: library part 74LVC1G125
U35: library part HYM8563S
Y2 Y4: library part CRYSTAL_4P
Y5: library part CRYSTAL_2P

## Via types
v1: diameter 16.14, hole 11.81, Top Layer to Bottom Layer, tented both sides, 1434 vias
v2: diameter 16.14, hole 11.81, Top Layer to Bottom Layer, 8 vias

## Nets (pads, with @x,y where several pads share a name; then routed paths per layer and width w, separated by ;. In a path a pad name is that pad's centre, name@x,y a point inside that pad or via, vN(x,y) a via of type N, cw(c..) or ccw(c..) an arc to the next point about the centre after c; other vN are vias at no path point)
1V05_AVDD_PHY1: C62.1 C63.1 C64.1 C65.1 R76.2 U3.3 U3.8 U3.38 | length 312.9
  Top Layer w12: U3.8@84.46,412.74 84.64,412.92 108.55,412.92 v1(108.73,413.1) ; U3.3@84.46,491.48 84.7,491.24 108.27,491.24 v1(108.51,491) ; U3.38@143.52,550.54 144.94,549.12 144.94,533.18 154.89,523.24 v1(155.18,523.24)
  Bottom Layer w12: R76.2@42.3,371.48 84,371.48 C62.1@94.06,381.54 99.86,387.34 99.86,405.84 C65.1@100.56,406.54 ; C65.1@100.72,419.5 100.72,441.4 94.92,447.2 95.63,447.91 95.63,477 108.51,489.88 v1(108.51,491) 109.3,491.79 109.3,506.76 116.44,513.9 144.72,513.9 154.06,523.24 v1(155.18,523.24)
1V05_DVDD_PHY1: C60.1 C61.1 R75.1 U3.21 | length 179.2
  Top Layer w12: U3.21@282.21,379.57 282.21,367.69 v1(283,366.9)
  Bottom Layer w12: C61.1@268.7,366.58 246.9,344.78 246.9,311.28 252.76,305.42 278.98,305.42 298.97,285.43 330.05,285.43 R75.1@335.52,290.9 ; v1@283,366.59 v1(283,366.9)
1V05_PHY1: C52.1 C53.1 L7.2 R75.2 R76.1 | length 758.9
  Bottom Layer w12: R76.1@31.9,323.2 31.2,322.5 31.2,253.8 61.4,223.6 316.08,223.6 R75.2@383.08,290.6 ; R75.2@383.58,292.8 416.54,325.76 416.54,566.36 v1(421.16,570.98) ; v1(419.6,599.5) 421.08,600.98 C53.1@422.34,600.98
  other v1: 441.1,570.7 440.86,598.48
1V8_DVDD_PHY1: C50.1 C51.1 C59.1 R48.1 R49.1 R50.1 R61.1 R62.1 R70.1 R381.1 U3.28 | length 867.6
  Top Layer w10: v1(253.66,390.16) 250.94,392.88 250.94,477.2 264.55,490.81 280.65,490.81 U3.28@281.32,491.48 309.1,491.48 ; v1(269.7,284.7) 270.11,285.11 297.98,285.11 v1(316.39,303.5)
  Top Layer w12: R70.1@107.86,273.92 v1(141.56,273.92) ; 309.1,491.48 327.1,509.48 C50.1@332.66,509.48 ; v1(316.45,656.85) 317.61,658.01 318.61,658.01 335.82,658.02 v1(336.12,657.72) ; v1@336.89,658.01 337.2,657.7 337.86,658.36 350.54,658.36 R381.1@351.2,659.02
  Bottom Layer w10: v1(316.39,303.5) 316.39,303.59 R50.1@337.08,324.28
  Bottom Layer w12: v1(141.56,273.92) 141.81,274.17 149.95,274.17 159.71,283.93 220.4,283.93 ; v1(269.7,284.7) 268.93,283.93 220.4,283.93 ; v1(316.45,656.85) 337.1,636.21 v1(337.08,515.78) ; R49.1@337.08,387.28 R48.1@337.08,418.78 277.98,418.78 252.3,393.1 252.3,390.5 220.4,358.6 220.4,283.93
  other v1: 352.57,527.92 355.8,657.4
3V3_AVDD_PHY1: C66.1 C67.1 C68.1 R383.1 U3.11 U3.40 | length 424.3
  Top Layer w12: v1(9.12,332.6) 40.19,332.6 41.19,331.61 54.45,331.61 76.52,353.68 U3.11@112.02,353.68 ; v1(20.28,546.3) 20.78,545.8 40.3,545.8 v1(40.8,545.3) 41.59,546.09 53.96,546.09 60.07,552.21 U3.40@110.35,552.21
  Bottom Layer w12: v1(9.12,332.6) 9.12,333.72 12.79,337.4 12.79,350.98 v1(13.58,351.77) ; v1@13.4,351.92 19.8,358.32 19.8,454.82 19.52,455.1 19.52,478.6 19.52,512 19.52,545.54 v1(20.28,546.3)
3V3_DVDD_PHY1: C69.1 C70.1 C71.1 R63.1 R64.2 R69.1 R73.2 R74.2 R382.1 U3.29 | length 2040.7
  Top Layer w10: v1(56.37,191.45) 56.37,193.11 69.26,206 69.26,218.26 96.59,245.59 104.79,245.59 v1(105.97,246.77)
  Bottom Layer w10: R64.2@-790.7,370.8 -831.14,411.24 -831.14,479.86 -774.2,536.8 -467.1,536.8 -430.6,573.3 -343.6,573.3 -307.1,536.8 -121.7,536.8 -106.3,521.4 -106.3,421.1 -12.3,327.1 -12.3,244.24 39.87,192.07 55.75,192.07 v1(56.37,191.45) ; v1(105.97,246.77) 105.97,248.43 107.86,250.32 R69.1@107.86,273.92 128,294.06 128,297.09 128.66,297.75 128.66,353.53 134.52,359.39 164.36,359.39 170.22,365.24 170.22,380.72 177.66,388.16 177.66,448.46 C70.1@198.6,469.4 198.53,469.47 R73.2@198.53,504.75 ; R73.2@198.46,504.82 R73.2@198.53,504.75 ; R382.1@240.64,668.7 252.26,657.08 252.26,638.96 R74.2@259.06,632.16 293.64,597.58 293.92,597.58 322.1,569.41 322.1,538.35 316.28,532.54 316.28,529.5 301.3,514.52 279.46,514.52 277.26,512.32 269.66,512.32 C69.1@264.19,506.86 ; v1(262.26,508.46) 263.87,506.86 C69.1@264.19,506.86 ; R73.2@198.53,504.75 210.66,492.62 210.66,489.27 215.93,484 246.99,484 254.06,491.07 254.06,495.06 264.19,505.19 C69.1@264.19,506.86
  other v1: 268.76,636.18
AUTO_PWRON_EN: BTB_1.86 R24.1 | length 69.7
  Top Layer w6.16: R24.1@435.08,-31.54 BTB_1.86@435.08,38.17
BAT_RTC: C238.1 CR1.1 D57.1 D59.1 | length 1361.9
  Top Layer w12: D59.1@2302.1,1514.4 2301.52,1514.4 D59.1@2298.85,1517.07 ; C238.1@2335.5,1517.07 D59.1@2298.85,1517.07 ; C238.1@2335.5,1519.4 2339.5,1515.4 2736.8,1515.4 2762.4,1489.8 2762.4,1301.9 2717.8,1257.3 2516.68,1257.3 2503.76,1244.38 2503.76,1239.49 v1(2502.97,1238.7) ; D57.1@2397.9,1772.2 2364.47,1738.77 2349.83,1738.77 2274.4,1663.34 2274.4,1541.52 D59.1@2298.7,1517.22 D59.1@2298.85,1517.07
  Bottom Layer w12: v1(2502.97,1238.7) 2503.9,1237.77 2503.9,1203.67 CR1.1@2535.7,1171.87
CAM0_nRST: J1.22 U4.5 | length 4294.7
  Top Layer w6.16: v1(1401.74,2222.28) 1401.1,2221.64 1401.1,2108.19 1437.69,2071.6 1928.09,2071.6 2080.09,1919.6 2080.09,1546.9 2083.69,1543.3 2083.69,1490.9 v1(2103.59,1471) ; U4.5@2223.01,1029.66 v1(2223.01,1119.2)
  Layer 4 w5.61: v1(2103.59,1471) 2103.59,1218.61 2114.49,1207.71 2134.51,1207.71 v1(2223.01,1119.2)
  Bottom Layer w6.16: J1.22@-9.81,3489.66 -9.81,3333.21 193.4,3130 193.4,2519.89 256.7,2456.59 1298.58,2456.59 1401.1,2354.07 1401.1,2222.92 v1(1401.74,2222.28)
CAM0_PWDN: J1.15 U4.4 | length 4346
  Top Layer w6.16: v1(1382.2,2219.9) 1382.2,2090.9 1434,2039.1 1935,2039.1 2054.5,1919.6 2054.5,1546.9 2058.1,1543.3 2058.1,1490.9 2078,1471 v1(2079.77,1471) ; U4.4@2197.42,1029.66 v1(2197.42,1119.2)
  Layer 4 w5.61: v1(2079.77,1471) 2078,1469.23 2078,1349.38 2082,1345.37 2082,1226.6 2189.41,1119.2 v1(2197.42,1119.2)
  Layer 4 w6.16: v1(107.5,3189.6) 107.5,3424.1 101,3430.6 101,3446.4 111.2,3456.6 127.2,3456.6 145.7,3438.1 v1(145.7,3423.1)
  Bottom Layer w6.16: v1(107.5,3189.6) 107.5,3186.9 179.2,3115.2 179.2,2512.2 245.25,2446.15 1294.65,2446.15 1382.2,2358.6 v1(1382.2,2219.9) ; J1.15@127.99,3489.66 129.9,3487.75 129.9,3454.83 144.32,3440.41 144.32,3424.48 v1(145.7,3423.1)
CORE_VCC_1V8_S0: BTB_1.12 BTB_1.89 L4.1 Q15.1 Q23.1 R172.1 R174.1 R175.1 R191.1 R273.2 R381.2 | length 12677.9
  Top Layer w12: v1(195.6,1177.6) 222.71,1204.71 222.71,1208.11 249.03,1234.43 466.97,1234.43 474,1241.46 474,1274.3 461.5,1286.8 461.5,1920.6 543.6,2002.7 543.6,2039.2 538.4,2044.4 538.4,2230.17 545.43,2237.2 669.23,2237.2 687.43,2255.4 v1(687.9,2255.4) ; BTB_1.89@374.94,71.54 374.94,93.24 373.41,94.78 v1(373.41,95.9) 373.4,97.02 376.02,99.64 BTB_1.12@376.02,162.28 ; v1(407.8,3403.6) 418.1,3393.3 517.3,3393.3 535.1,3375.5 v1(565.18,3375.5) ; v1(1789.01,3521.54) 1795.29,3521.54 1798.49,3524.74 1902.41,3524.74 v1(1927.51,3499.64) 1927.51,3450.34 1922.11,3444.94 1922.11,3421.14 v1(1888.61,3387.64)
  Layer 4 w12: v1(-539.8,3601.8) -521.75,3619.85 -486.35,3619.85 -481.8,3624.4 -383.5,3624.4 -331.6,3572.5 -331.6,3514 -261,3443.4 -168.5,3443.4 -137.4,3412.3 18.9,3412.3 57,3374.2 57,3197.5 100.5,3154 231,3154 251.1,3174.1 251.1,3246.9 v1(407.8,3403.6) ; v1(234.6,776.2) 234.6,742.3 236.1,740.8 237.2,739.7 ; v1@354.7,697.5 362.3,697.5 415.4,644.4 563.3,644.4 606.46,687.56 1151.44,687.56 1217.2,621.8 1404.7,621.8 1482.7,699.8 v1(1850.5,699.8) ; v1(565.18,3375.5) 566.5,3375.5 566.7,3375.7 644.1,3375.7 693.3,3424.9 773.8,3424.9 819,3379.7 870,3379.7 943.1,3452.8 943.1,3496.5 973.5,3526.9 1277.9,3526.9 1299.1,3548.1 1762.45,3548.1 v1(1789.01,3521.54) ; 696.3,2259.7 696.3,2322.2 720.5,2346.4 827.2,2346.4 857.2,2316.4 857.2,2286.2 1033.9,2109.5 1627.47,2109.5 1634.5,2116.53 1634.5,2249.2 1711.4,2326.1 1711.4,2747.9 1769.5,2806 1960.5,2806 1960.73,2805.77 1972.09,2805.77 1982.67,2795.19 1982.67,2783.83 1984.93,2781.57 1994.87,2781.57 1995.5,2782.2 2029.7,2782.2 2043.7,2796.2 2043.7,3055.1 2024.8,3074 2024.8,3344.7 2025.4,3345.3 2025.4,3402.5 v1@1926.3,3501.6 ; v1(2247.2,334) 2256.3,343.1 2256.3,379.1 2255.21,380.19 2255.21,398.88 2261.13,404.8 2269.5,404.8 v1(2305.2,440.5)
  Layer 4 w20: v1(352.2,698.3) 352.2,703.7 315.1,740.8 236.1,740.8 174.4,740.8 173.4,739.8 49,739.8 -5.9,684.9 -5.9,622.7 -47.8,580.8 -47.8,553.5 -14.2,519.9 -14.2,252.47 -13.8,252.07 -13.8,181.75 136.44,31.51 361.69,31.51 373.41,43.23 v1(373.41,95.9)
  Bottom Layer w12: v1(195.6,1177.6) 195.6,921.6 238.6,878.6 238.6,780.2 v1(234.6,776.2) ; R191.1@1672.5,3486.66 1760.42,3486.66 Q23.1@1795.2,3521.44 ; v1(1850.5,699.8) 1866.1,684.2 1866.1,658.64 1899.8,624.94 1899.8,603.1 1937.1,565.8 1937.1,473.6 2076.7,334 v1(2247.2,334) ; v1(1927.51,3499.64) 1948.19,3499.64 Q15.1@1957.4,3508.84 2020.66,3508.84 2031.95,3520.14 2129.41,3520.14 2140.8,3531.52 2140.8,3534.76 2146.67,3540.64 2258.81,3540.64 2280,3561.83 R175.1@2280,3646.66 ; L4.1@2282.4,475.3 2300.76,456.94 2300.76,444.94 v1(2305.2,440.5)
CORE_VCC_1V8_S3: BTB_1.11 BTB_1.90 R3.1 R119.1 R276.1 R284.1 | length 6293.8
  Top Layer w10: BTB_1.11@356.34,195.65 BTB_1.90@356.34,38.17 356.34,-10.8 359.97,-14.43 359.97,-56.67 396.5,-93.2 1613.5,-93.2 v1(1650.7,-56) ; v1(2096.6,-20.1) 2222.3,-20.1 2223.5,-18.9 2250,-18.9 2265.3,-34.2 2265.3,-62.93 v1(2265.6,-63.23) ; v1(2291.7,2010.8) 2291.7,2030.14 R284.1@2294.26,2032.7 ; v1(2416.2,1802.53) 2416.3,1802.53 2442,1776.83 R276.1@2442,1744.26 ; R119.1@2860.91,804.64 2873.31,792.24 2873.31,789.11 v1@2885.54,776.88
  Layer 4 w10: v1(2265.6,-63.23) 2266.27,-63.23 2319.2,-10.3 2345.89,-10.3 2374.25,18.05 2374.25,437.35 2383,446.1 2383,481.7 2423.2,521.9 2698.3,521.9 v1(2729.4,490.8) ; v1(2291.7,2010.8) 2305.8,1996.7 2305.8,1803 ; v1(2416.2,1802.53) 2415.73,1803 2305.8,1803 ; v1(2475.7,1380.83) 2475.7,1227.34 2522.14,1180.9 ; v1(2963.9,746.6) 3000.2,782.9 3000.2,1104 2930.6,1173.6 2930.6,1174.54 2924.74,1180.4 2785.74,1180.4 2785.57,1180.23 2771.43,1180.23 2771.26,1180.4 2590,1180.4 2589.5,1180.9 2522.14,1180.9 ; 2305.8,1803 2208.71,1705.91 2208.71,1395.19 2274.7,1329.2 2274.7,1227.2 2321,1180.9 2522.14,1180.9
  Bottom Layer w10: v1(1650.7,-56) 1681.8,-56 1733.7,-4.1 1990.7,-4.1 1990.9,-3.9 2080.4,-3.9 v1(2096.6,-20.1) ; v1(2729.4,490.8) 2919.8,490.8 2928.3,499.3 2967.34,499.3 2973.2,505.16 2973.2,531.1 2983.8,541.7 2983.8,647.4 2971.1,660.1 2971.1,739.4 v1(2963.9,746.6) 2956.7,753.8 2913.7,753.8 v1(2891.8,775.7)
CORE_VCC_3V3_S0: BTB_1.9 BTB_1.92 L5.1 R77.1 | length 6259.5
  Top Layer w12: 316.97,-15.43 BTB_1.92@316.97,38.17 BTB_1.9@316.97,195.65 ; R77.1@1689.57,2351.3 1695.37,2345.5 1695.37,2336.43 1702.58,2329.22 1773.75,2329.22 1785.63,2341.1 1885.68,2341.1 1922.51,2304.27 1922.51,2285.69 v1(1923.3,2284.9) ; v1(1891.1,898.9) 2094.7,898.9 2138.5,942.7 2297.5,942.7 2370.1,870.1 2431.4,870.1 2474.88,826.62 2474.88,799.92 v1@2475.4,799.4
  Top Layer w20: 316.97,-15.43 316.97,-93.57 363.4,-140 1717.6,-140 1775.1,-82.5 v1(1775.1,-70.7)
  Layer 4 w12: v1(1922.4,2204.2) 1923.3,2205.1 v1(1923.3,2284.9)
  Layer 4 w20: v1(1775.1,-70.7) 1775.1,-67.3 1809.5,-32.9 2008.1,-32.9 2060.5,-85.3 2328.9,-85.3 2393.25,-20.95 2393.25,147.25 2394.7,148.7 2394.7,236.23 2393.54,237.38 2393.54,394.44 2416.7,417.6 2705.4,417.6 2753.2,465.4 2753.2,508.2 2733.27,528.13 2733.27,561.66 2710.54,584.4 2677.7,584.4 2565.6,696.5 2565.6,710.33 v1(2475.38,800.55)
  Bottom Layer w12: v1(1891.1,898.9) 1892.2,900 1892.2,1913 1922.4,1943.2 v1(1922.4,2204.2)
  Bottom Layer w20: L5.1@2366.27,849.46 2372.02,843.71 2372.02,835.58 2389.9,817.7 2458.23,817.7 v1(2475.38,800.55)
CORE_VCC_3V3_S3: BTB_1.8 BTB_1.93 C31.1 C32.1 C81.1 C235.1 C236.1 D57.2 R43.1 R87.1 R285.1 U4.24 U5.3 U5.4 U33.5 U34.5 U40.5 | length 11335.2
  Top Layer w12: v1(296.1,72.8) 297.28,71.62 BTB_1.93@297.28,38.17 ; BTB_1.93@297.29,72.8 296.69,73.4 296.69,195.06 BTB_1.8@297.28,195.65 ; v1(1953.65,1266.5) U4.24@2120.56,1266.5 ; v1(2494.4,2007) 2494.4,2130.6 2607.6,2243.8 2607.6,2389.2 v1(2596.9,2399.9)
  Layer 4 w12: 38.3,508.8 38.3,159.34 138.44,59.2 281.38,59.2 294.98,72.8 v1(296.1,72.8) ; 38.6,508.8 61.8,532 61.8,593.2 75.5,606.9 94.1,606.9 132.4,645.2 195.1,645.2 226.8,676.9 226.8,694.5 244.7,712.4 283.1,712.4 295.87,699.63 295.87,627.23 302.9,620.2 546.7,620.2 616.7,550.2 869.5,550.2 973.7,654.4 1130.2,654.4 1207,577.6 1207,436.5 1232.7,410.8 1373.4,410.8 1396.3,433.7 1396.3,557.9 1395.6,558.6 1395.6,570.6 1447.3,622.3 1567.4,622.3 1606.8,582.9 1853.8,582.9 1877.1,606.2 1877.1,707.5 1922.9,753.3 1922.9,756.4 1991.7,825.2 1991.7,999.3 1934.9,1056.1 1934.9,1259.9 1941.5,1266.5 ; v1(544.7,3339.5) 576.43,3307.77 576.43,3198.01 602.51,3171.93 621.39,3171.93 624.03,3174.57 635.47,3174.57 635.72,3174.82 635.72,3028.45 687.03,2977.14 687.03,2974.21 697.61,2963.63 700.54,2963.63 741.7,2922.47 741.7,2723.7 728.9,2710.9 728.9,2458.7 730,2457.6 730,2381.7 648.9,2300.6 648.9,2238 563.47,2152.57 563.47,2080.43 570.5,2073.4 673.7,2073.4 797,1950.1 1875,1950.1 1941.5,1883.6 1941.5,1266.5 ; v1(635.72,3175.36) 636.51,3176.16 641.55,3176.16 679.87,3214.47 712.33,3214.47 v1(746.1,3180.7) ; v1(1953.65,1266.5) 1941.5,1266.5
  Bottom Layer w12: U40.5@-318,3656.41 -318,3644.61 -291.69,3618.3 -261.39,3618.3 -237.33,3642.36 -237.33,3666.64 -202.87,3701.1 -64.2,3701.1 41,3595.9 391.51,3595.9 429.01,3558.4 429.01,3552.53 434.87,3546.67 480.43,3546.67 535.04,3492.06 535.04,3444.27 544.7,3434.6 v1(544.7,3339.5) ; 643.46,3183.23 646.23,3183.23 R87.1@659.4,3196.4 ; C81.1@698.76,3161.43 701.92,3164.59 734.93,3164.59 U5.3@735.02,3164.69 740.74,3164.69 740.83,3164.78 v1@740.83,3174.62 ; v1(746.1,3180.7) 746.49,3181.09 747.31,3181.09 753.13,3186.92 U5.4@753.13,3192.64 ; R43.1@2197.42,1222.58 2157.31,1262.7 v1(2119.8,1262.7) 2119.8,1369 2281.2,1530.4 2281.2,1631.5 2405,1755.3 2470.2,1755.3 2482.9,1768 2482.9,1789.23 2475.87,1796.26 2454.15,1796.26 2429.81,1820.6 2369,1820.6 ; v1(2315.8,1772) 2364.4,1820.6 2369,1820.6 ; R285.1@2419.63,2473.22 2419.63,2500.54 2478.81,2559.73 2547.5,2559.73 2554.53,2552.7 2554.53,2509.07 2574.46,2489.14 U34.5@2589.96,2489.14 2605.46,2489.14 2622.7,2471.9 ; v1(2494.4,2007) 2487.41,2007 2369,1888.59 2369,1820.6 ; C235.1@2585.16,2355.8 2585.16,2396.64 U33.5@2587.16,2398.64 ; U33.5@2589.46,2398.64 2604.96,2398.64 2624.03,2417.71 2624.03,2470.57 2622.7,2471.9 ; 2621.9,2471.9 2622.7,2471.9 ; C236.1@2648.36,2496.04 2624.22,2471.9 2622.7,2471.9